# Altium PCB G100_PTC_RS232_201806.PcbDoc
Units mm, origin at the board's own origin, x right, y up, seen from the top; angles counter-clockwise.
Board outline 360.05 x 186.94 mm, 2 copper layers (Top Layer, Bottom Layer); 84 components, 108 nets, 416 pads, 298 vias.
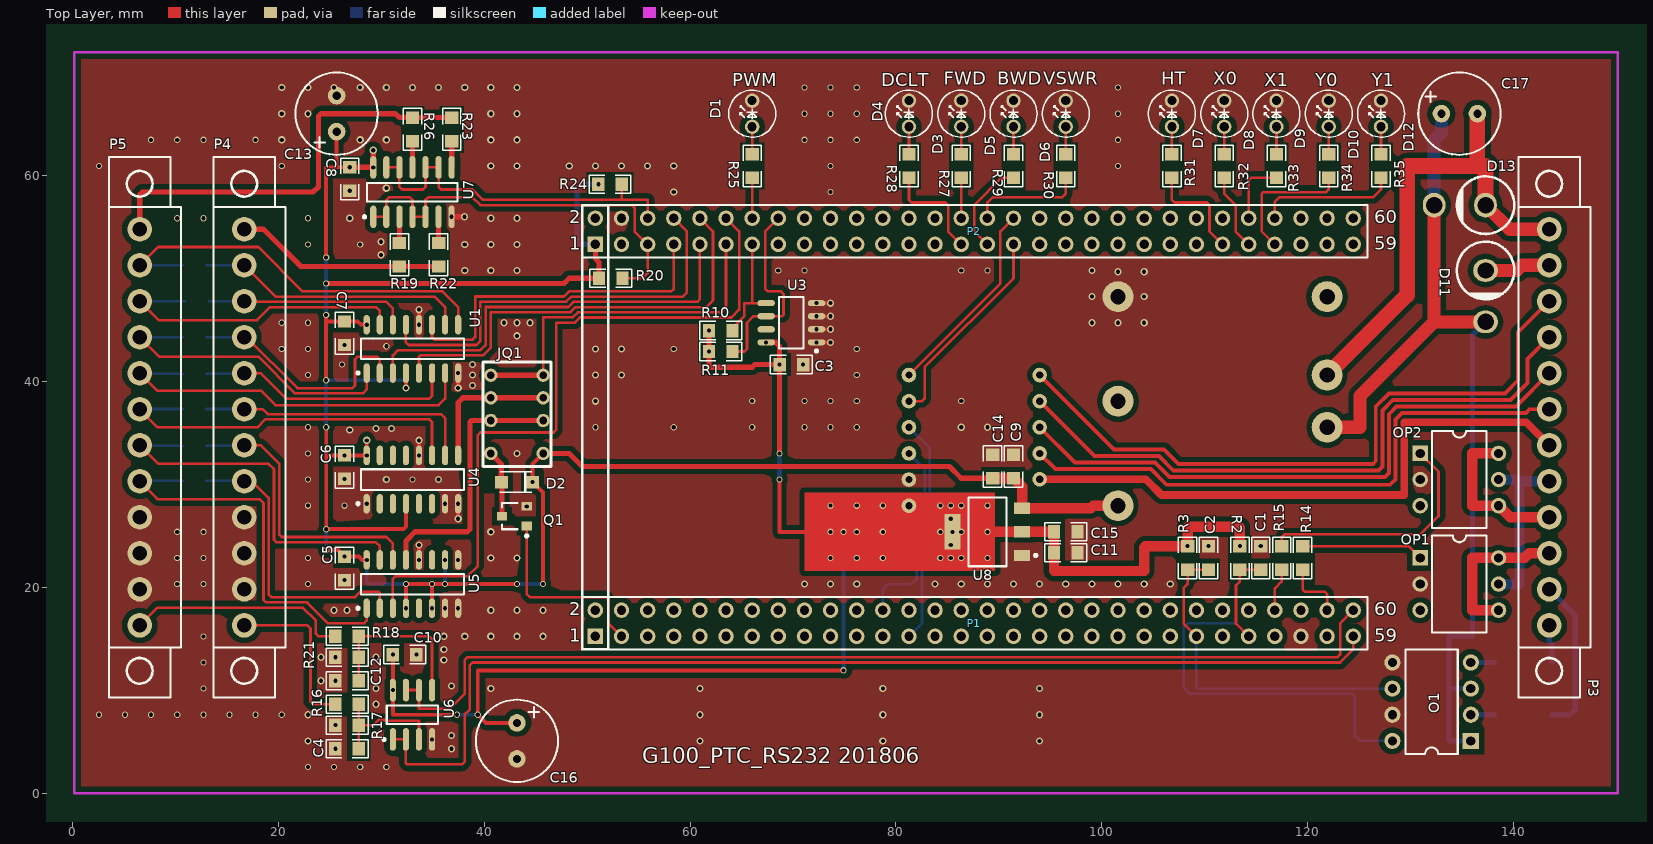
[diagram p0: Top Layer view]
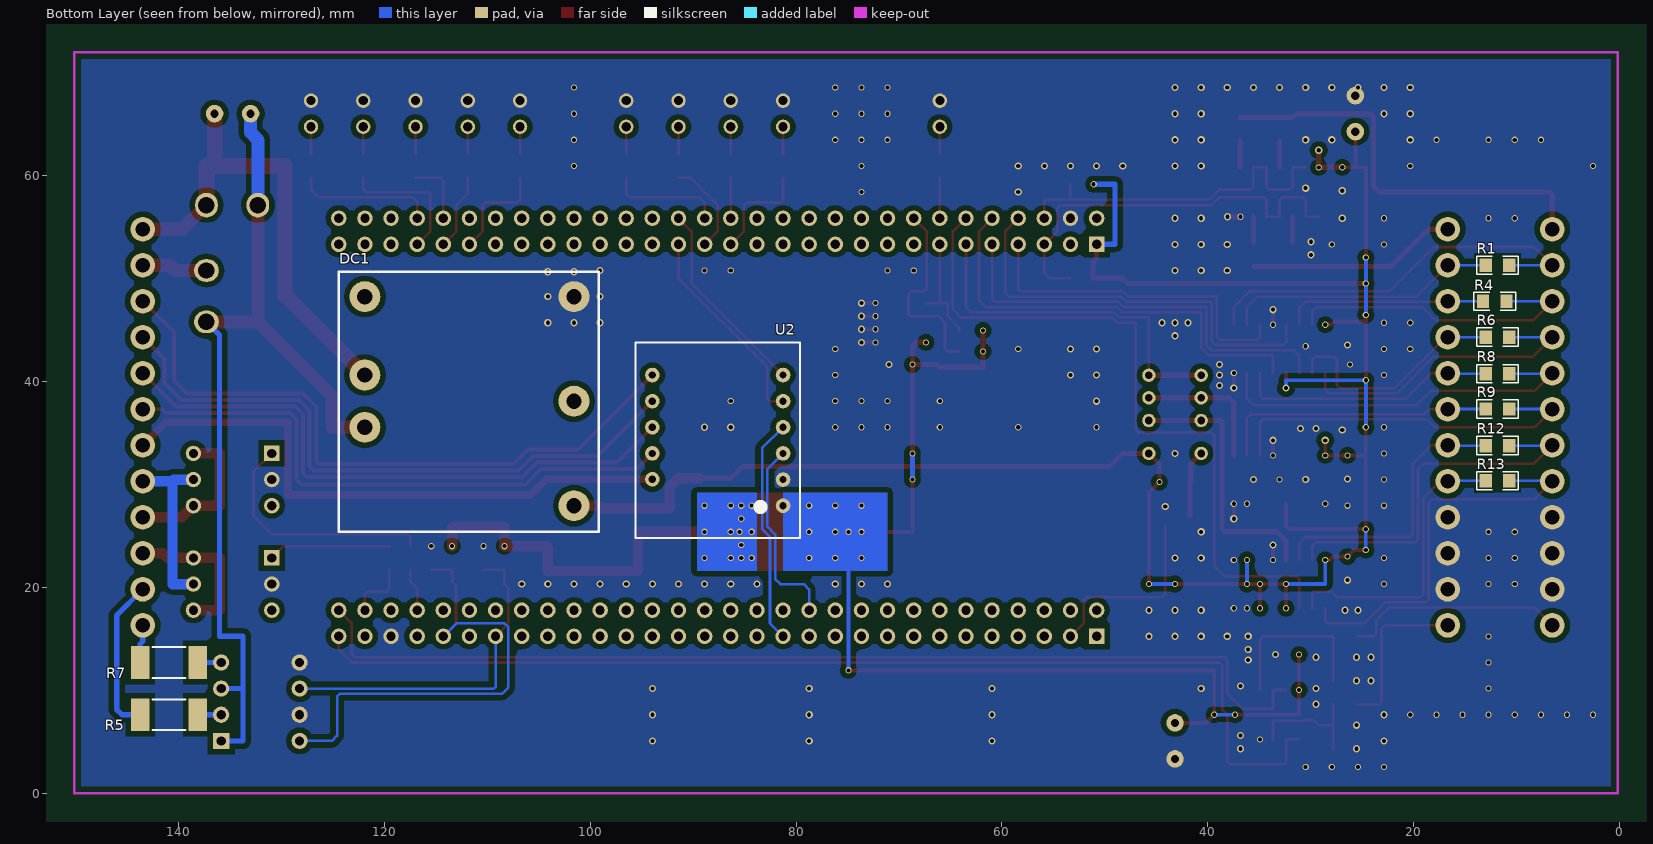
[diagram p1: Bottom Layer view, seen from below]

## Layer stack, top to bottom
Top Layer: signal copper 0.0356
Dielectric: core 0.32, FR-4, Dk 4.8
Bottom Layer: signal copper 0.0356

## Board outline
-43.434,103.632 -33.528,93.726 -33.528,-71.374 302.133,-71.374 312.547,-81.788 308.483,-77.724 308.483,101.6 -43.942,101.6 -47.498,105.156

## Design rules (kind name [scope] priority, off if disabled: settings)
Clearance Clearance_1 [(INPolygon)] p1: gap=0.508
Clearance [All] p2: gap=0.254
ComponentClearance [All] p1: gap=0.025 collisioncheckmode=2 verticalgap=0.254
HoleSize [All] p1: absolutevalues=TRUE maxlimit=25.4 minlimit=0.025 maxpercent=80.000 minpercent=20.000
PlaneConnect [All] p1: planeconnectstyle=Direct reliefexpansion=0.508 reliefentries=4 reliefconductorwidth=0.254 reliefairgap=0.254
PolygonConnect [All] p1: connectstyle=Direct reliefconductorwidth=0.254 reliefentries=4 polygonreliefangle="90 Angle"
RoutingVias [All] p1: holewidth=0.711 width=1.27 viastyle="Through Hole" minholewidth=0.4 minwidth=0.6 maxholewidth=3 maxwidth=1.27
SolderMaskExpansion [All] p1: expansion=0.102
TestPointUsage [All] p1: valid=0 allowmultiple=FALSE
Testpoint [All] p1: side=15 testpointundercomponent=TRUE minsize=1.016 maxsize=2.54 preferedsize=1.524 minholesize=0 maxholesize=1.016 preferedholesize=0.813 testpointgrid=0.025 style=1023 order=0123456789
Width [All] p1: maxlimit=2.54 minlimit=0.254 preferedwidth=0.254 minimp=50.000000 maximp=50.000000 favimp=50.000000
16 further rules are at their usual default settings.

## Components (designator, comment, footprint, x,y, rotation, side; value= is the part's Value field where it differs from the comment)
C1 "1nF" 0805C 115.476,22.86 r270 top
C2 "1nF" 0805C 110.396,22.86 r270 top
C3 "0.1uF" 0805C 69.85,41.656 r0 top
C4 "0.1uF" 0805C 26.67,4.318 r180 top
C5 "0.1uF" 0805C 26.416,21.844 r270 top
C6 "0.1uF" 0805C 26.416,31.686 r270 top
C7 "0.1uF" 0805C 26.416,44.704 r270 top
C8 "0.1uF" 0805C 26.924,59.69 r270 top
C9 "0.1uF" 0805C 91.44,31.75 r90 top
C10 "0.1uF" 0805C 32.258,13.462 r0 top
C11 "0.1uF" 0805C 96.52,23.368 r0 top
C12 "0.1uF" 0805C 26.67,10.922 r180 top
C13 "470uF/25V" RB3.5-8 25.654,66.04 r270 top
C14 "0.1uF" 0805C 89.408,31.75 r90 top
C15 "0.1uF" 0805C 96.52,25.4 r0 top
C16 "470uF/25V" RB3.5-8 43.18,5.08 r90 top
C17 "470uF/25V" RB3.5-8 134.78,66.04 r180 top
D1 "LED0" LEDLight 66.04,66.04 r90 top
D2 "DIODE1" SOD123 44.704,30.226 r180 top
D3 "LED0" LEDLight 86.36,66.04 r90 top
D4 "LED0" LEDLight 81.28,66.04 r90 top
D5 "LED0" LEDLight 91.44,66.04 r90 top
D6 "LED0" LEDLight 96.52,66.04 r90 top
D7 "LED0" LEDLight 106.84,66.04 r90 top
D8 "LED0" LEDLight 111.92,66.04 r90 top
D9 "LED0" LEDLight 117,66.04 r90 top
D10 "LED0" LEDLight 122.08,66.04 r90 top
D11 "DIODE1" DIODE-DO56 137.32,50.8 r270 top
D12 "LED0" LEDLight 127.16,66.04 r90 top
D13 "DIODE1" DIODE-DO56 137.32,57.15 r180 top
DC1 "HZD05-24D12" HZ03V2 111.76,38.1 r180 bottom
JQ1 "IM06TS" IM06TS 45.72,33.02 r90 top
O1 "TLP521-2" DIP-8 135.89,5.08 r180 top
OP1 "KAQV210" DIP-6 134.78,20.32 r270 top
OP2 "KAQV210" DIP-6 134.78,30.48 r270 top
P1 "JP1" HDR2X30 50.8,15.24 r0 top
P2 "JP2" HDR2X30 50.8,53.34 r0 top
P3 "Header 12" 15EDGVM-3.5-12P-14 143.51,35.56 r270 top
P4 "Header 12" 15EDGVM-3.5-12P-14 16.67,35.56 r270 top locked
P5 "Header 12" 15EDGVM-3.5-12P-14 6.51,35.56 r270 top locked
Q1 "BCW31" SOT-23A 42.926,26.924 r90 top
R1 "120R" 0805C 11.844,51.308 r0 bottom
R2 "3.3K" 0805C 113.444,22.86 r270 top
R3 "3.3K" 0805C 108.364,22.86 r270 top
R4 "120R" 0805C 12.098,47.816 r0 bottom
R5 "1.2K" 6332[2512] 140.97,7.62 r180 bottom
R6 "120R" 0805C 11.844,44.323 r180 bottom
R7 "1.2K" 6332[2512] 140.97,12.7 r180 bottom
R8 "120R" 0805C 11.844,40.767 r180 bottom
R9 "120R" 0805C 11.844,37.338 r180 bottom
R10 "3.3K" 0805C 62.992,44.958 r0 top
R11 "3.3K" 0805C 62.992,42.926 r0 top
R12 "120R" 0805C 11.844,33.782 r180 bottom
R13 "120R" 0805C 11.844,30.353 r180 bottom
R14 "220R" 0805C 119.54,22.86 r90 top
R15 "220R" 0805C 117.508,22.86 r90 top
R16 "120R" 0805C 26.67,8.636 r0 top
R17 "120R" 0805C 26.67,6.604 r0 top
R18 "120R" 0805C 26.67,15.24 r0 top
R19 "2R2" 0805C 31.75,52.324 r90 top
R20 "10K" 0805C 52.293,50.038 r180 top
R21 "120R" 0805C 26.67,13.208 r0 top
R22 "2R2" 0805C 35.56,52.324 r90 top
R23 "2R2" 0805C 36.83,64.516 r270 top
R24 "10K" 0805C 52.23,59.182 r180 top
R25 "510R" 0805C 66.04,60.96 r270 top
R26 "2R2" 0805C 33.02,64.516 r270 top
R27 "510R" 0805C 86.36,60.96 r270 top
R28 "510R" 0805C 81.28,60.96 r270 top
R29 "510R" 0805C 91.44,60.96 r270 top
R30 "510R" 0805C 96.52,60.96 r270 top
R31 "510R" 0805C 106.84,60.96 r270 top
R32 "510R" 0805C 111.92,60.96 r270 top
R33 "510R" 0805C 117,60.96 r270 top
R34 "510R" 0805C 122.08,60.96 r270 top
R35 "510R" 0805C 127.16,60.96 r270 top
U1 "DS26C32ATM" M16A_L 33.02,43.18 r90 top
U2 "RSM232D" CTM-8251D 81.28,27.94 r0 bottom
U3 "FM24LC64" SOP8_L 69.85,45.72 r180 top
U4 "DS26C31TM" M16A_L 33.02,30.48 r90 top
U5 "DS26C32ATM" M16A_L 33.02,20.32 r90 top
U6 "LM358D" 751-02_N 33.02,7.62 r90 top
U7 "SN74HC00D" D014_N 33.02,58.42 r90 top
U8 "REG1117-3.3" ZZ311 88.9,25.4 r90 top

## Footprints (in the part's own frame and the unit in brackets; to place one, negate y for a bottom-side part, rotate by r counter-clockwise, add the part's x,y. Pads: shape width x height; smd on the part's side, far side on the other; paste and mask are expansions set on the pad)
15EDGVM-3.5-12P-14 [mm]
  round 2.4 hole 1.4: 1(-19.25,0) 2(-15.75,0) 3(-12.25,0) 4(-8.75,0) 5(-5.25,0) 6(-1.75,0) 7(1.75,0) 8(5.25,0) 9(8.75,0) 10(12.25,0) 11(15.75,0) 12(19.25,0)
  silkscreen extent -26.25,-3 26.25,4
751-02_N [mm] "SOIC, 8-Leads, Body 4.9x3.9mm, Pitch 1.27mm, IPC Medium Density"
  oval 2.2x0.6 smd: 1(-2.4,1.905) 2(-2.4,0.635) 3(-2.4,-0.635) 4(-2.4,-1.905) 5(2.4,-1.905) 6(2.4,-0.635) 7(2.4,0.635) 8(2.4,1.905)
  silkscreen extent -2.52,-2.5 0.9,2.88, body extent -1.95,-2.45 1.95,2.45, height 1.75
0805C [mm]
  rect 1.2x1.3 smd: 1(1.143,0) 2(-1.143,0)
  silkscreen extent -2.03,-0.89 2.03,0.89
6332[2512] [mm] "Chip Resistor; Body 6.3 x 3.2 mm (LxW typ)"
  rect 1.8x3.2 smd: 1(-2.8,0) 2(2.8,0)
  silkscreen extent -1.6,-1.5 1.6,1.5
CTM-8251D [mil]
  round 56 hole 28: 1(0,0) 2(0,-100) 3(0,-200) 4(0,-300) 5(0,-400) 6(0,-500) 7(500,-500) 8(500,-400) 9(500,-300) 10(500,-200) 11(500,-101)
  silkscreen extent -65,-624 565,124
D014_N [mm] "SOIC, 14-Leads, Body 8.7x3.9mm, Pitch 1.27mm, IPC Medium Density"
  oval 2.2x0.6 smd: 1(-2.4,3.81) 2(-2.4,2.54) 3(-2.4,1.27) 4(-2.4,0) 5(-2.4,-1.27) 6(-2.4,-2.54) 7(-2.4,-3.81) 8(2.4,-3.81) 9(2.4,-2.54) 10(2.4,-1.27) 11(2.4,0) 12(2.4,1.27) 13(2.4,2.54) 14(2.4,3.81)
  silkscreen extent -2.52,-4.4 0.9,4.78, body extent -2,-4.38 2,4.38, height 1.75
DIODE-DO56 [mm]
  oval 2.2x2.4 hole 1.6: 1(0,0) 2(5,0)
  silkscreen extent -2.8,-2.8 2.8,2.8
DIP-6 [mm] "DIP; 6 Leads; Row Spacing 7.62 mm; Pitch 2.54 mm"
  rect 1.5x1.5 hole 0.9: 1(-2.54,-3.81)
  round 1.5 hole 0.9: 2(0,-3.81) 3(2.54,-3.81) 4(2.54,3.81) 5(0,3.81) 6(-2.54,3.81)
  silkscreen extent -4.7,-2.65 4.7,2.65
DIP-8 [mil]
  rect 62x62 hole 35: 1(0,0)
  round 62 hole 35: 2(0,-100) 3(0,-200) 4(0,-300) 5(300,-300) 6(300,-200) 7(300,-100) 8(300,0)
  silkscreen extent 50,-350 250,50
HDR2X30 [mm] "Connector; Header; 30x2 Position"
  rect 1.5x1.5 hole 0.9: 1(0,0)
  round 1.5 hole 0.9: 2(0,2.54) 3(2.54,0) 4(2.54,2.54) 5(5.08,0) 6(5.08,2.54) 7(7.62,0) 8(7.62,2.54) 9(10.16,0) 10(10.16,2.54) 11(12.7,0) 12(12.7,2.54) 13(15.24,0) 14(15.24,2.54) 15(17.78,0) 16(17.78,2.54) 17(20.32,0) 18(20.32,2.54) 19(22.86,0) 20(22.86,2.54) 21(25.4,0) 22(25.4,2.54) 23(27.94,0) 24(27.94,2.54) 25(30.48,0) 26(30.48,2.54) 27(33.02,0) 28(33.02,2.54) 29(35.56,0) 30(35.56,2.54) 31(38.1,0) 32(38.1,2.54) 33(40.64,0) 34(40.64,2.54) 35(43.18,0) 36(43.18,2.54) 37(45.72,0) 38(45.72,2.54) 39(48.26,0) 40(48.26,2.54) 41(50.8,0) 42(50.8,2.54) 43(53.34,0) 44(53.34,2.54) 45(55.88,0) 46(55.88,2.54) 47(58.42,0) 48(58.42,2.54) 49(60.96,0) 50(60.96,2.54) 51(63.5,0) 52(63.5,2.54) 53(66.04,0) 54(66.04,2.54) 55(68.58,0) 56(68.58,2.54) 57(71.12,0) 58(71.12,2.54) 59(73.66,0) 60(73.66,2.54)
  silkscreen extent -1.27,-1.27 75.06,3.81
HZ03V2 [mm]
  round 3 hole 1.5: 1(-10.16,10.16) 2(-10.16,2.54) 3(-10.16,-2.54) 4(10.16,-10.16) 5(10.16,0) 6(10.16,10.16)
  silkscreen extent -12.7,-12.7 12.57,12.57
IM06TS [mm]
  round 1.3 hole 0.75: 1(0,0) 2(3.2,0) 3(5.4,0) 4(7.6,0) 5(7.6,5.08) 6(5.4,5.08) 7(3.2,5.08) 8(0,5.08)
  silkscreen extent -1.27,-0.76 8.89,5.84
LEDLight [mil]
  round 55 hole 35: 1(-50,0) 2(50,0)
  silkscreen extent -90,-90 90,90
M16A_L [mm] "SOIC, 16-Leads, Body 9.9x3.9mm, Pitch 1.27mm, IPC High Density"
  oval 1.9x0.6 smd: 1(-2.35,4.445) 2(-2.35,3.175) 3(-2.35,1.905) 4(-2.35,0.635) 5(-2.35,-0.635) 6(-2.35,-1.905) 7(-2.35,-3.175) 8(-2.35,-4.445) 9(2.35,-4.445) 10(2.35,-3.175) 11(2.35,-1.905) 12(2.35,-0.635) 13(2.35,0.635) 14(2.35,1.905) 15(2.35,3.175) 16(2.35,4.445)
  silkscreen extent -2.47,-5 1,5.42, body extent -2,-5 2,5, height 1.75
RB3.5-8 [mm]
  round 1.7 hole 0.8: 1(1.75,0) 2(-1.75,0)
  silkscreen extent -4,-4 4,4
SOD123 [mil]
  rect 50x48 smd: 1(120,0) 2(0,0)
  silkscreen extent 3,-40 126,39
SOP8_L [mm] "SOIC, 8-Leads, Body 4.9x3.9mm, Pitch 1.27mm, IPC High Density"
  oval 1.7x0.6 smd: 1(-2.45,1.905) 2(-2.45,0.635) 3(-2.45,-0.635) 4(-2.45,-1.905) 5(2.45,-1.905) 6(2.45,-0.635) 7(2.45,0.635) 8(2.45,1.905)
  silkscreen extent -2.58,-2.5 1.2,2.88, body extent -2,-2.5 2,2.5, height 1.75
SOT-23A [mm] "SOT-23; 3 Leads; Body 3.1 x 2.5 mm, inc. leads (LxW max)"
  rect 0.85x1 smd: 1(-0.95,-1.2) 2(0.95,-1.2) 3(0,1.2)
  silkscreen extent -2.05,-1.32 1.28,1.2
ZZ311 [mm] "SOT-223/SC-73; 4 Leads; Body 6.7 x 7.3 mm, inc. leads (LxW max)"
  rect 1.1x1.55 smd: 1(-2.3,-3.375) 2(0,-3.375) 3(2.3,-3.375)
  rect 3.45x1.55 smd: 4(0,3.375)
  silkscreen extent -3.35,-4.83 3.35,1.85

## Part data
C1 C2 C3 C4 C5 C6 C7 C8 C9 C10 C11 C12 C14 C15: library part Cap, "Capacitor"
C13 C16 C17: library part "Cap Pol2", "Polarized Capacitor (Axial)"
D1 D3 D4 D5 D6 D7 D8 D9 D10 D12: "Typical INFRARED GaAs LED"
O1: "Photocoupler"
P1 P2: library part "Header 30X2", "Header, 30-Pin, Dual row"
P3 P4 P5: "Header, 12-Pin"
Q1: "NPN Epitaxial Silicon Transistor"
R1 R2 R3 R4 R5 R6 R7 R8 R9 R10 R11 R12 R13 R14 R15 R16 R17 R18 R19 R20 R21 R22 R23 R24 R25 R26 R27 R28 R29 R30 R31 R32 R33 R34 R35: library part Res2, "Resistor"
U1 U5: "CMOS Quad Differential Line Receiver"
U2: "双路隔离RS-232收发器"
U3: library part M24C64MN3, "64 Kbit Serial I睠 Bus EEPROM"
U4: "CMOS Quad Tri-State Differential Line Driver"
U6: "Dual Low-Power Operational Amplifier"
U7: "Quadruple 2-Input Positive-NAND Gate"
U8: "800mA and 1A Low Dropout Positive Regulator 2.85V, 3.3V, 5V, and Adjustable"

## Via types
v1: diameter 0.6, hole 0.4, Top Layer to Bottom Layer, 159 vias
v2: diameter 0.7, hole 0.4, Top Layer to Bottom Layer, 139 vias

## Nets (pads, with @x,y where several pads share a name; then routed paths per layer and width w, separated by ;. In a path a pad name is that pad's centre, name@x,y a point inside that pad or via, vN(x,y) a via of type N, cw(c..) or ccw(c..) an arc to the next point about the centre after c; other vN are vias at no path point)
+3.3V: C3.2 C10.2 C11.2 C15.2 C16.1 R2.2 R3.2 R10.2 R11.2 U2.1 U3.8 U6.8 U8.2 U8.4 | length 145.8
  Top Layer w0.381: v1(31.115,13.462) 31.115,7.62 v1(37.338,7.62) ; C16.1 40.16,6.83 v1(39.37,7.62) 39.37,11.938 v1(74.93,11.938) ; 68.707,25.527 68.834,25.4 ; v1(68.707,30.48) 68.707,25.4 v1(74.93,25.4)
  Top Layer w0.508: v1(61.849,44.958) 61.849,41.402 66.04,41.402 66.294,41.656 v1(68.707,41.656) ; v1(67.4,43.815) 68.326,43.815 68.707,43.434 v1(68.707,33.02)
  Top Layer w1.016: v1(85.525,25.4) C15.2 95.377,21.59 104.14,21.59 104.14,23.876 104.267,24.003 v1(108.364,24.003) 108.364,25.875 113.378,25.875 113.444,25.809 v1(113.444,24.003)
  Bottom Layer w0.381: v1(37.338,7.62) v1(39.37,7.62) ; v1(74.93,11.938) v1(74.93,25.4)
  Bottom Layer w0.508: v1(68.707,30.48) v1(68.707,33.02)
  other v1: 31.115,10.02 73.66,22.86 76.2,22.86 78.74,22.86 84.328,22.86 85.344,22.86 86.36,22.86 88.9,22.86 85.344,24.13 73.66,25.4 76.2,25.4 78.74,25.4 84.328,25.4 86.36,25.4 88.9,25.4 85.344,26.67 73.66,27.94 76.2,27.94 78.74,27.94 84.328,27.94 85.344,27.94 86.36,27.94 88.9,27.94 61.849,42.926
+5V: C5.2 C6.2 C7.2 C8.2 C9.2 C13.1 C14.2 D2.2 DC1.4 JQ1.1 P2.1 R20.1 R24.1 U1.4 U1.16 U4.4 U4.16 U5.4 U5.6 U5.10 U5.16 U7.14 U8.3 | length 220.1
  Top Layer w0.381: v1(24.635,40.129) v1(24.635,46.482) ; 24.635,45.847 27.686,45.847 28.003,45.53 v1(28.575,45.53) ; v1(24.635,52.067) 24.635,60.833 v1(26.924,60.833) ; v1(24.638,23.622) 25.781,23.622 v1(26.416,22.987) 27.813,22.987 28.13,22.67 v1(28.575,22.67) ; 24.638,32.766 24.701,32.829 v1(28.574,32.829) v2(28.575,34.29) ; v1@24.638,35.56 v1(24.638,25.654) 32.131,25.654 32.385,25.908 U4.4 ; 25.654,60.833 C13.1 ; v1(32.385,17.97) v1(32.385,20.32) v1(43.18,20.32) ; v2(32.385,39.37) U1.4 ; v1(34.925,17.97) v1(34.925,20.32) ; v1(45.72,20.32) 45.72,29.21 v1(44.704,30.226) 44.704,32.004 JQ1.1
  Top Layer w0.508: v1(24.635,49.527) 47.749,49.527 48.26,50.038 R20.1 51.15,51.593 50.8,51.943 P2.1 ; v1(26.924,60.833) 29.197,60.833 v1(29.21,60.82) v2(29.21,62.484) ; JQ1.1 48.26,33.02 49.53,31.75 85.217,31.75 86.36,30.607 C14.2
  Top Layer w1.016: C14.2 C9.2 92.275,29.772 U8.3 98.947,27.7 99.187,27.94 DC1.4
  Bottom Layer w0.381: v1(24.635,35.563) v1(24.635,40.129) 32.382,40.129 32.382,39.373 v2(32.385,39.37) ; v1(24.635,46.482) v1(24.635,52.067) ; v1(24.638,23.622) v1(24.638,25.654) ; v1(28.575,22.67) 28.575,20.32 v1(32.385,20.32) ; v1(36.195,20.32) v1(36.195,22.67) ; v1(43.18,20.32) v1(45.72,20.32)
  Bottom Layer w0.508: P2.1 49.022,53.34 49.022,59.182 v1(51.087,59.182)
  other v1: 26.416,32.829
+24V: C17.1 D11.2 D13.2 DC1.3 O1.1 O1.3 | length 89.7
  Top Layer w1.27: DC1.3 125.128,35.56 125.128,38.608 132.32,45.8 ; D13.2 132.32,45.8 ; D11.2 132.32,45.8
  Bottom Layer w0.508: 133.764,10.16 O1.3 ; O1.1 133.764,5.08 133.764,15.24 136.05,15.24 136.05,44.53 D11.2
  Bottom Layer w1.27: D13.2 132.32,63.5 133.03,64.21 C17.1
ADC_IN1: P1.59 U6.1 U6.2 | length 106.8
  Top Layer w0.254: U6.1 U6.2 32.385,2.921 32.512,2.794 37.846,2.794 38.1,3.048 38.1,7.62 38.608,8.128 38.608,12.446 38.862,12.7 123.19,12.7 124.46,13.97 P1.59
ADC_IN2: P1.60 U6.6 U6.7 | length 101.6
  Top Layer w0.254: U6.7 U6.6 33.655,8.255 33.718,8.191 36.639,8.191 38.1,9.652 38.1,12.954 38.354,13.208 122.936,13.208 123.19,13.462 123.19,16.51 P1.60
AIM: P2.59
ANALOG_BACK: P5.12 R18.2 | length 21.6
  Top Layer w0.254: P5.12 8.234,18.034 22.352,18.034 23.622,16.764 23.622,15.494 23.876,15.24 R18.2
ANALOG_FWD: P4.12 R16.2 | length 16.2
  Top Layer w0.254: P4.12 22.806,16.31 23.114,16.002 23.114,8.89 23.368,8.636 R16.2
COM: OP1.5 OP2.5 P3.8 | length 17.1
  Bottom Layer w1.016: OP1.5 140.622,20.32 140.622,30.353 ; OP2.5 140.495,30.48 140.665,30.31 P3.8
DAC_OUT1: P2.60
DAC_OUT2: P2.57
DIGITAL_BWD_N: P5.5 R8.1 U1.7 | length 37.9
  Top Layer w0.254: P5.5 8.204,39.116 18.288,39.116 19.685,37.719 35.56,37.719 36.195,38.354 U1.7
  Bottom Layer w0.254: P5.5@6.553,40.767 R8.1
DIGITAL_BWD_P: P4.5 R8.2 U1.6 | length 25.3
  Top Layer w0.254: P4.5 18.288,40.81 20.777,38.321 34.638,38.321 34.925,38.608 U1.6
  Bottom Layer w0.254: R8.2 P4.5@16.627,40.767
DIGITAL_DCLT_N: P5.3 R4.2 U1.15 | length 30.6
  Top Layer w0.254: P5.3 8.346,45.974 17.907,45.974 19.174,47.241 29.467,47.241 29.845,46.863 U1.15
  Bottom Layer w0.254: P5.3 6.515,47.816 R4.2
DIGITAL_DCLT_P: P4.3 R4.1 U1.14 | length 19.7
  Top Layer w0.254: P4.3 16.731,47.749 30.483,47.749 31.115,47.117 U1.14
  Bottom Layer w0.254: R4.1 P4.3@16.665,47.816
DIGITAL_FWD_N: P5.4 R6.1 U1.1 | length 30.2
  Top Layer w0.254: P5.4 8.402,42.418 18.034,42.418 21.59,38.862 28.194,38.862 28.575,39.243 U1.1
  Bottom Layer w0.254: P5.4@6.523,44.323 R6.1
DIGITAL_FWD_P: P4.4 R6.2 U1.2 | length 23.1
  Top Layer w0.254: P4.4 16.904,44.31 21.844,39.37 27.178,39.37 27.432,39.624 27.432,42.164 27.686,42.418 29.591,42.418 29.845,42.164 U1.2
  Bottom Layer w0.254: R6.2 P4.4@16.657,44.323
DIGITAL_HTMP_N: P5.8 R13.1 U5.1 | length 38.7
  Top Layer w0.254: P5.8 8.245,28.575 18.161,28.575 18.542,28.194 18.542,18.796 18.796,18.542 22.766,18.542 24.798,16.51 28.321,16.51 28.575,16.764 U5.1
  Bottom Layer w0.254: P5.8@6.553,30.353 R13.1
DIGITAL_HTMP_P: P4.8 R13.2 U5.2 | length 28.7
  Top Layer w0.254: P4.8 17.442,30.31 19.05,28.702 19.05,19.304 19.304,19.05 27.432,19.05 27.94,19.558 29.718,19.558 29.845,19.431 U5.2
  Bottom Layer w0.254: R13.2 P4.8@16.627,30.353
DIGITAL_MOD_N: P5.6 R9.1 U4.11 | length 37
  Top Layer w0.254: P5.6 8.26,35.56 17.94,35.56 18.702,36.322 34.671,36.322 34.925,36.068 U4.11
  Bottom Layer w0.254: P5.6@6.538,37.338 R9.1
DIGITAL_MOD_P: P4.6 R9.2 U4.10 | length 27.2
  Top Layer w0.254: P4.6 18.476,37.31 18.956,36.83 35.814,36.83 36.195,36.449 U4.10
  Bottom Layer w0.254: R9.2 P4.6@16.642,37.338
DIGITAL_REF_EN: P4.1 R19.2 R22.2 | length 20.4
  Top Layer w0.508: P4.1 18.542,54.81 22.171,51.181 R22.2
DIGITAL_REFL_N: P5.7 R12.1 U5.15 | length 36.9
  Top Layer w0.254: P5.7 8.316,32.004 19.05,32.004 19.558,31.496 19.558,24.638 19.812,24.384 29.464,24.384 29.845,24.003 U5.15
  Bottom Layer w0.254: P5.7@6.538,33.782 R12.1
DIGITAL_REFL_P: P4.7 R12.2 U5.14 | length 27.7
  Top Layer w0.254: P4.7 18.288,33.81 20.066,32.032 20.066,25.146 20.32,24.892 30.48,24.892 31.115,24.257 U5.14
  Bottom Layer w0.254: R12.2 P4.7@16.642,33.782
DIGITAL_RF_EN: P5.1 R23.2 R26.2 | length 41.1
  Top Layer w0.508: P5.1 6.51,58.166 6.764,58.42 23.368,58.42 23.876,58.928 23.876,65.786 24.13,66.04 31.369,66.04 31.75,65.659 R23.2
DIGITAL_VSWR_N: P5.2 R1.2 U1.9 | length 40
  Top Layer w0.254: P5.2 8.286,53.086 18.034,53.086 22.355,48.765 35.944,48.765 37.465,47.244 U1.9
  Bottom Layer w0.254: P5.2@6.512,51.308 R1.2
DIGITAL_VSWR_P: P4.2 R1.1 U1.10 | length 26.6
  Top Layer w0.254: P4.2 19.723,48.257 35.182,48.257 36.195,47.244 U1.10
  Bottom Layer w0.254: R1.1 P4.2@16.668,51.308
ESTOP_B: P2.56
GND: C1.2 C2.2 C3.1 C4.1 C5.1 C6.1 C7.1 C8.1 C9.1 C10.1 C11.1 C12.1 C13.2 C14.1 C15.1 C16.2 D1.2 D3.2 D4.2 D5.2 D6.2 D7.2 D8.2 D9.2 D10.2 D12.2 DC1.6 O1.5 O1.7 OP1.2 OP2.2 P1.55 P2.4 P4.9 P4.10 P4.11 P5.9 P5.10 P5.11 Q1.2 R17.2 R21.2 U1.8 U1.12 U2.2 U3.1 U3.2 U3.3 U3.4 U4.1 U4.7 U4.8 U4.12 U5.7 U5.8 U5.9 U5.12 U6.4 U7.7 U8.1 | length 14
  Top Layer w0.381: v1(33.655,22.67) v2(33.655,24.13) ; v1(33.655,32.83) v2(33.655,34.29) ; v1(33.655,45.53) v2(33.655,46.99) ; v2(37.465,26.67) v1(37.465,28.13) ; v2(37.465,39.37) v1(37.465,40.83) ; v1(72.3,43.815) v2(73.66,43.815) ; v1(72.3,45.085) v2(73.66,45.085) ; v1(72.3,46.355) v2(73.66,46.355) ; v1(72.3,47.625) v2(73.66,47.625)
  Top Layer w0.508: v1(36.83,56.02) v2(38.087,56.02)
  other v1: 22.86,2.54 25.4,2.54 27.94,2.54 30.48,2.54 34.925,5.22 2.54,7.62 5.08,7.62 7.62,7.62 10.16,7.62 12.7,7.62 15.24,7.62 17.78,7.62 20.32,7.62 12.7,10.16 12.7,12.7 12.7,15.24 36.195,17.97 37.465,17.97 10.16,20.32 12.7,20.32 22.86,20.32 37.465,22.67 10.16,22.86 12.7,22.86 22.86,22.86 110.396,24.003 115.476,24.003 10.16,25.4 12.7,25.4 22.86,27.94 26.416,27.94 28.575,28.13 36.195,28.13 22.86,30.48 33.02,30.48 22.86,33.02 22.86,35.56 50.8,35.56 58.42,35.56 66.04,35.56 71.12,35.56 73.66,35.56 76.2,35.56 66.04,38.1 71.12,38.1 73.66,38.1 76.2,38.1 86.36,38.1 22.86,40.64 76.2,40.64 26.162,41.656 20.32,43.18 22.86,43.18 58.42,43.18 76.2,43.18 30.48,43.434 20.32,45.72 22.86,45.72 68.58,50.8 71.12,50.8 86.36,50.8 88.9,50.8 22.86,53.34 27.94,53.34 10.16,55.88 12.7,55.88 22.86,55.88 73.66,58.42 2.54,60.96 20.32,60.96 73.66,60.96 101.6,60.96 7.62,63.5 10.16,63.5 12.7,63.5 17.78,63.5 71.12,63.5 73.66,63.5 76.2,63.5 101.6,63.5 71.12,66.04 73.66,66.04 76.2,66.04 101.6,66.04 71.12,68.58 73.66,68.58 76.2,68.58 101.6,68.58
  other v2: 25.527,4.318 36.83,4.318 22.86,5.08 60.96,5.08 78.74,5.08 93.98,5.08 36.83,5.588 25.527,6.604 22.86,7.62 60.96,7.62 78.74,7.62 93.98,7.62 29.464,8.636 29.464,10.16 40.64,10.16 60.96,10.16 78.74,10.16 93.98,10.16 36.83,10.414 24.13,10.922 25.527,10.922 36.068,12.954 24.13,13.208 25.527,13.208 29.464,13.208 33.401,13.462 36.068,13.97 36.068,15.24 38.1,15.24 40.64,15.24 43.18,15.24 45.72,15.24 25.4,17.78 26.67,17.78 40.64,17.78 43.18,17.78 45.72,17.78 71.12,20.32 73.66,20.32 76.2,20.32 83.82,20.32 86.36,20.32 88.9,20.32 91.44,20.32 93.98,20.32 96.52,20.32 99.06,20.32 101.6,20.32 104.14,20.32 106.68,20.32 26.416,20.701 40.64,22.86 43.18,22.86 40.64,25.4 44.126,27.874 30.48,30.48 35.56,30.48 26.416,30.543 43.18,33.02 26.924,35.306 29.464,35.433 30.988,35.433 86.36,35.56 88.9,35.56 50.8,38.1 38.862,39.624 38.862,40.64 50.8,40.64 53.34,40.64 38.862,41.656 70.993,41.656 50.8,43.18 53.34,43.18 26.416,43.561 43.18,44.45 41.91,45.72 43.18,45.72 44.45,45.72 99.06,45.72 101.6,45.72 104.14,45.72 99.06,48.26 104.14,48.26 101.6,50.673 104.14,50.673 38.1,50.8 40.64,50.8 43.18,50.8 99.06,50.8 29.972,52.324 38.1,53.34 40.64,53.34 43.18,53.34 29.972,53.594 26.924,55.88 40.64,55.88 43.18,55.88 58.42,58.42 26.924,58.547 30.48,58.801 40.64,60.96 43.18,60.96 48.26,60.96 50.8,60.96 53.34,60.96 55.88,60.96 58.42,60.96 20.32,63.5 27.94,63.5 30.48,63.5 40.64,63.5 43.18,63.5 20.32,66.04 22.86,66.04 40.64,66.04 43.18,66.04 20.32,68.58 22.86,68.58 25.4,68.58 27.94,68.58 30.48,68.58 33.02,68.58 35.56,68.58 38.1,68.58 40.64,68.58 43.18,68.58
GND24: C17.2 D13.1 DC1.2 P3.1 | length 47.2
  Top Layer w1.27: D13.1 139.66,54.81 P3.1
  Top Layer w1.524: DC1.2 129.7,48.42 129.7,60.96 137.32,60.96 D13.1 ; 136.53,60.988 C17.2
JTMS: P2.3
LED_BWD: P2.31 R29.1 | length 9.3
  Top Layer w0.254: P2.31 87.63,54.61 87.63,57.15 90.297,59.817 R29.1
LED_DCLT: P2.29 R28.1 | length 10.5
  Top Layer w0.254: R28.1 81.28,57.658 81.534,57.404 84.836,57.404 85.09,57.15 85.09,54.61 P2.29
LED_FWD: P2.30 R27.1 | length 3.9
  Top Layer w0.254: P2.30 R27.1
LED_HTMP: P2.49 R31.1 | length 10.4
  Top Layer w0.254: R31.1 106.84,57.658 107.094,57.404 110.236,57.404 110.49,57.15 110.49,54.61 P2.49
LED_PWM: P2.14 R25.1 | length 3.9
  Top Layer w0.254: P2.14 R25.1
LED_VSWR: P2.32 R30.1 | length 11
  Top Layer w0.254: P2.32 88.9,57.404 89.408,57.912 96.139,57.912 96.52,58.293 R30.1
LED_X0: P2.51 R32.1 | length 7.5
  Top Layer w0.254: R32.1 111.92,58.26 113.03,57.15 113.03,54.61 P2.51
LED_X1: P2.52 R33.1 | length 6.5
  Top Layer w0.254: P2.52 114.3,59.53 114.587,59.817 R33.1
LED_Y0: P2.53 R34.1 | length 13.3
  Top Layer w0.254: P2.53 115.57,54.61 115.57,58.26 115.73,58.42 121.826,58.42 122.08,58.674 R34.1
LED_Y1: P2.54 R35.1 | length 13.6
  Top Layer w0.254: P2.54 116.84,57.498 117.254,57.912 126.398,57.912 127.16,58.674 R35.1
MCU_BWD: P2.10 U1.5 | length 43
  Top Layer w0.254: U1.5 33.655,42.418 33.782,42.545 39.878,42.545 40.64,43.307 40.64,46.746 48.38,46.746 48.878,47.244 61.595,47.244 62.23,47.879 62.23,54.61 P2.10
MCU_DCLT: P2.8 U1.13 | length 41.2
  Top Layer w0.254: U1.13 32.385,43.815 32.639,43.561 39.243,43.561 39.624,43.942 39.624,47.762 47.959,47.762 48.458,48.26 59.309,48.26 59.69,48.641 59.69,54.61 P2.8
MCU_FWD: P2.9 U1.3 | length 41.3
  Top Layer w0.254: U1.3 31.115,42.545 31.623,43.053 39.624,43.053 40.132,43.561 40.132,47.254 48.17,47.254 48.668,47.752 60.706,47.752 60.96,48.006 P2.9
MCU_HTMP: P2.12 U5.3 | length 70.3
  Top Layer w0.254: U5.3 31.115,20.828 31.369,21.082 38.354,21.082 39.37,22.098 39.37,34.798 39.624,35.052 46.736,35.052 46.99,35.306 46.99,45.73 48.801,45.73 49.299,46.228 64.008,46.228 64.77,46.99 64.77,54.61 P2.12
MCU_MOD_P: JQ1.3 JQ1.6 U4.9 | length 13.6
  Top Layer w0.508: U4.9 37.465,37.973 37.912,38.42 JQ1.3
MCU_PWM: JQ1.4 JQ1.5 P2.11 | length 35
  Top Layer w0.254: JQ1.4 45.72,46.238 48.59,46.238 49.089,46.736 62.992,46.736 63.5,47.244 P2.11
  Top Layer w0.508: JQ1.5 JQ1.4
MCU_REF_EN: P2.6 R24.2 U7.9 U7.10 U7.12 U7.13 | length 35.1
  Top Layer w0.254: U7.13 U7.12 31.75,58.928 32.004,58.674 34.036,58.674 34.29,58.928 U7.10 U7.9 35.56,58.928 35.814,58.674 38.862,58.674 39.878,57.658 55.88,57.658 P2.6 ; 53.373,57.658 R24.2
MCU_REFL: JQ1.2 JQ1.7 U5.13 | length 26.1
  Top Layer w0.508: U5.13 32.385,24.511 33.274,25.4 38.354,25.4 38.608,25.654 38.608,36.068 38.76,36.22 JQ1.2
MCU_RF_EN: P2.5 R20.2 U7.1 U7.2 U7.4 U7.5 | length 40.6
  Top Layer w0.254: U7.1 U7.2 30.48,57.658 30.734,57.912 32.766,57.912 33.02,57.658 U7.4 U7.5 34.29,57.658 34.544,57.912 38.862,57.912 39.624,57.15 54.356,57.15 54.61,56.896 54.61,54.61 P2.5 55.88,50.546 55.372,50.038 R20.2
MCU_VSWR: P2.7 U1.11 | length 33.5
  Top Layer w0.254: U1.11 34.925,44.323 35.179,44.069 38.862,44.069 39.116,44.323 39.116,48.27 47.749,48.27 48.247,48.768 58.166,48.768 58.42,49.022 P2.7
MCU_X0: C2.1 O1.6 P1.47 R3.1 | length 33.2
  Top Layer w0.254: P1.47 107.983,16.477 107.983,19.939 108.364,20.32 R3.1 C2.1
  Bottom Layer w0.254: P1.47 109.22,10.32 109.38,10.16 O1.6
MCU_X1: C1.1 O1.8 P1.51 R2.1 | length 46.7
  Top Layer w0.254: P1.51 113.063,16.477 113.063,20.193 113.444,20.574 R2.1 C1.1
  Bottom Layer w0.254: P1.51 113.03,16.51 108.364,16.51 107.983,16.129 107.983,10.287 108.618,9.652 124.366,9.652 124.62,9.398 124.62,5.588 125.128,5.08 O1.8
MCU_Y0: P1.58 R14.2 | length 6
  Top Layer w0.254: R14.2 119.54,19.812 119.794,19.558 121.699,19.558 121.92,19.337 P1.58
MCU_Y1: P1.54 R15.2 | length 4.2
  Top Layer w0.254: P1.54 116.84,19.906 117.508,20.574 R15.2
MOD_LOOP: P1.3 Q1.1 | length 18.9
  Top Layer w0.254: Q1.1 44.126,19.374 44.45,19.05 51.816,19.05 52.07,18.796 52.07,16.51 P1.3
MSEL0_B: P1.16
MSEL1_B: P1.18
MSEL3_B: P1.19
MSEL4_B: P1.20
NetC4_2: C4.2 R16.1 R17.1 U6.3 | length 12.2
  Top Layer w0.254: C4.2 R16.1 ; R17.1 29.21,6.604 29.718,7.112 30.543,7.112 30.543,7.048 33.591,7.048 33.655,6.985 U6.3
NetC12_2: C12.2 R18.1 R21.1 U6.5 | length 16.5
  Top Layer w0.254: C12.2 R18.1 34.671,15.24 34.925,14.986 U6.5
NetD1_1: D1.1 R25.2 | length 2.7
  Top Layer w0.254: R25.2 D1.1
NetD2_1: D2.1 JQ1.8 Q1.3 | length 6.5
  Top Layer w0.508: JQ1.8 41.656,32.004 D2.1 41.726,30.156 Q1.3
NetD3_1: D3.1 R27.2 | length 2.7
  Top Layer w0.254: R27.2 D3.1
NetD4_1: D4.1 R28.2 | length 2.7
  Top Layer w0.254: R28.2 D4.1
NetD5_1: D5.1 R29.2 | length 2.7
  Top Layer w0.254: R29.2 D5.1
NetD6_1: D6.1 R30.2 | length 2.7
  Top Layer w0.254: R30.2 D6.1
NetD7_1: D7.1 R31.2 | length 2.7
  Top Layer w0.254: R31.2 D7.1
NetD8_1: D8.1 R32.2 | length 2.7
  Top Layer w0.254: R32.2 D8.1
NetD9_1: D9.1 R33.2 | length 2.7
  Top Layer w0.254: R33.2 D9.1
NetD10_1: D10.1 R34.2 | length 2.7
  Top Layer w0.254: R34.2 D10.1
NetD12_1: D12.1 R35.2 | length 2.7
  Top Layer w0.254: R35.2 D12.1
NetO1_2: O1.2 R5.2 | length 2.3
  Bottom Layer w0.508: O1.2 R5.2
NetO1_4: O1.4 R7.2 | length 2.3
  Bottom Layer w0.508: O1.4 R7.2
NetOP1_1: OP1.1 R14.1 | length 11.9
  Top Layer w0.254: R14.1 129.827,24.003 OP1.1
NetOP2_1: OP2.1 R15.1 | length 23.8
  Top Layer w0.254: R15.1 117.508,24.892 117.762,25.146 130.97,25.146 132.748,26.924 132.748,31.242 OP2.1
NetR19_1: R19.1 U7.3 | length 2.6
  Top Layer w0.508: R19.1 U7.3
NetR22_1: R22.1 U7.6 | length 2.6
  Top Layer w0.508: R22.1 U7.6
NetR23_1: R23.1 U7.8 | length 2.6
  Top Layer w0.508: U7.8 R23.1
NetR26_1: R26.1 U7.11 | length 2.6
  Top Layer w0.508: U7.11 R26.1
NRESET: P1.50
RSGND: P3.7 U2.11 | length 58.2
  Top Layer w0.762: U2.11@94.005,30.48 U2.11 104.3,30.505 105.824,28.981 129.421,28.981 129.421,36.017 129.446,36.043 141.277,36.043 P3.7
RTC_AF1: P1.36
RXD1: P3.5 U2.9 | length 59.1
  Top Layer w0.381: U2.9 97.409,32.131 105.189,32.131 106.586,30.734 127.541,30.734 127.922,31.115 127.922,36.83 128.684,37.592 140.292,37.592 P3.5
RXD3: P3.3 U2.7 | length 65.5
  Top Layer w0.381: U2.7 101.219,33.401 106.078,33.401 107.475,32.004 126.398,32.004 126.652,32.258 126.652,37.592 127.922,38.862 139.225,38.862 140.495,40.132 140.495,44.795 P3.3
SHUT1_B: P1.23
SHUT2_B: P1.26
SHUT3_B: P1.27
SHUT4_B: P1.30
SI2C_SCL: P2.16 R11.1 U3.6 | length 19.3
  Top Layer w0.254: R11.1 65.278,42.926 65.532,43.18 65.532,45.72 66.167,46.355 68.961,46.355 69.088,46.482 69.088,48.514 68.834,48.768 67.564,48.768 67.31,49.022 67.31,54.61 P2.16
SI2C_SDA: P2.13 R10.1 U3.5 | length 11
  Top Layer w0.254: R10.1 64.135,45.212 65.278,46.355 65.278,47.625 U3.5 ; 66.04,47.625 P2.13
TIM8_BKIN: P2.58
TIM8_CH1N: P2.55
TXD1: P3.6 U2.10 | length 57.3
  Top Layer w0.381: U2.10 95.504,31.496 104.808,31.496 106.332,29.972 128.049,29.972 128.557,30.48 128.557,36.322 129.192,36.957 141.257,36.957 141.61,37.31 P3.6
TXD3: P3.4 U2.8 | length 62.2
  Top Layer w0.381: U2.8 99.314,32.766 105.57,32.766 106.967,31.369 126.906,31.369 127.287,31.75 127.287,37.211 128.303,38.227 139.733,38.227 141.384,39.878 141.384,42.184 P3.4
USART1_RX: P1.25 U2.4 | length 22
  Bottom Layer w0.254: P1.25 82.55,16.51 82.55,24.892 83.312,25.654 83.312,33.528 U2.4
USART1_TX: P1.24 U2.3 | length 18.9
  Bottom Layer w0.254: P1.24 78.74,19.812 79.248,20.32 81.534,20.32 82.042,20.828 82.042,25.146 82.804,25.908 82.804,31.496 U2.3
USART3_RX: P2.34 U2.6 | length 19.4
  Top Layer w0.254: U2.6 90.17,49.53 90.17,54.61 P2.34
USART3_TX: P2.33 U2.5 | length 20.2
  Top Layer w0.254: U2.5 82.55,38.1 82.804,38.354 82.804,41.402 91.44,50.038 P2.33
VBAT: P1.35
VDDA: P1.57
VIN: D11.1 P3.2 | length 6.4
  Top Layer w1.27: D11.1 140.368,50.8 140.878,51.31 P3.2
VREF: P1.56
X0: P3.12 R7.1 | length 3.7
  Bottom Layer w0.508: P3.12 143.51,14.732 143.77,14.472 R7.1
X1: P3.11 R5.1 | length 15.2
  Bottom Layer w0.508: P3.11 146.05,17.27 146.05,8.128 145.542,7.62 R5.1
Y0: OP1.4 OP1.6 P3.10 | length 15.3
  Top Layer w1.016: OP1.4 136.05,17.78 136.05,22.86 141.13,22.86 141.58,23.31 P3.10
Y1: OP2.4 OP2.6 P3.9 | length 15.5
  Top Layer w1.016: OP2.6 136.05,33.02 136.05,27.94 OP2.4 139.72,26.81 P3.9
pads on no net: DC1.1 DC1.5 OP1.3 OP2.3 P1.1 P1.2 P1.4 P1.5 P1.6 P1.7 P1.8 P1.9 P1.10 P1.11 P1.12 P1.13 P1.14 P1.15 P1.17 P1.21 P1.22 P1.28 P1.29 P1.31 P1.32 P1.33 P1.34 P1.37 P1.38 P1.39 P1.40 P1.41 P1.42 P1.43 P1.44 P1.45 P1.46 P1.48 P1.49 P1.52 P1.53 P2.2 P2.15 P2.17 P2.18 P2.19 P2.20 P2.21 P2.22 P2.23 P2.24 P2.25 P2.26 P2.27 P2.28 P2.35 P2.36 P2.37 P2.38 P2.39 P2.40 P2.41 P2.42 P2.43 P2.44 P2.45 P2.46 P2.47 P2.48 P2.50 U3.7 U4.2 U4.3 U4.5 U4.6 U4.13 U4.14 U4.15 U5.5 U5.11

## Polygon pours and split planes (outlines as drawn)
GND on Top Layer "Bottom Layer-No Net" (solid, remove dead copper): 150.16,0 0.16,0 0.16,72 150.16,72 150.16,0
GND on Bottom Layer "Bottom Layer-No Net" (solid, remove dead copper): 0.16,72 0.16,0 150.16,0 150.16,72 0.16,72

## Keep-outs
Keep-Out Layer:
  lines w0.254: 0.16,0 0.16,72 150.16,72 150.16,0 0.16,0

## Other copper
Top Layer:
  rectangle net +3.3V: 71.12,21.59 89.662,29.21
Bottom Layer:
  rectangle net +3.3V: 71.12,21.59 81.28,29.21
  rectangle net +3.3V: 83.82,21.59 89.662,29.21

## Silkscreen, mask and mechanical layers (free items; w line width, h text height)
Top Overlay:
  lines w0.254: 49.53,13.97 52.07,13.97 52.07,57.15 49.53,57.15 49.53,13.97
  text "FWD" at 84.676,68.834 h1.27
  text "BWD" at 89.883,68.834 h1.27
  text "VSWR" at 94.328,68.834 h1.27
  text "HT" at 105.791,68.834 h1.27
  text "X0" at 110.871,68.834 h1.27
  text "PWM" at 64.102,68.707 h1.27
  text "DCLT" at 78.58,68.707 h1.27
  text "X1" at 115.824,68.707 h1.27
  text "Y0" at 120.777,68.707 h1.27
  text "Y1" at 126.238,68.707 h1.27
  text "G100_PTC_RS232 201806" at 55.372,2.921 h1.52
Top Solder:
  rectangle: 84.328,22.86 86.36,27.94
Mechanical 1:
  lines w0.254: 0.16,0 150.16,0 150.16,72 0.16,72 0.16,0

## Dimensions
150.16,72 to 150.16,0 on Mechanical 13
150.16,72 to 0.16,72 on Mechanical 13

## Text inside footprints (layer, text, board x,y; h text height)
P1: Top Overlay "2" at 48.26,17.272 h1.27; Top Overlay "1" at 48.26,14.732 h1.27; Top Overlay "59" at 126.492,14.732 h1.27; Top Overlay "60" at 126.492,17.272 h1.27
P2: Top Overlay "2" at 48.26,55.372 h1.27; Top Overlay "1" at 48.26,52.832 h1.27; Top Overlay "59" at 126.492,52.832 h1.27; Top Overlay "60" at 126.492,55.372 h1.27